# EAGLE board boneclamp (EAGLE 6.4)

Size 160 x 100 mm. Coordinates in mm from the lower left corner, seen from the top.
Outline: 0,0 160,0 160,100 0,100 0,0
Copper layers (1+2*15+16): Top 0.035mm / dielectric 1.5mm / Route2 0.035mm / dielectric 0.15mm / Route15 0.035mm / dielectric 0.2mm / Bottom 0.035mm
Design rules "default *": minimum track width 10mil, minimum drill 24mil, track to track 8mil, track to pad 8mil, pad to pad 8mil, via to via 8mil, smd to smd 8mil, copper to edge 40mil, drill to drill 8mil, minimum pad ring 10mil, minimum via ring 8mil, stop-mask expansion 4mil, vias tented up to drill 0mil, thermal gap 10mil

## Footprints (pad centres in the part's own frame; a part is rotated, then mirrored left to right if it is on the bottom)
HDF15H = drill 0.9 pad 1.778 octagon: 1 4.329,2.54 | drill 0.9 pad 1.778: 2 2.043,2.54; 3 -0.243,2.54; 4 -2.529,2.54; 5 -4.815,2.54; 6 5.472,0; 7 3.186,0; 8 0.9,0; 9 -1.386,0; 10 -3.672,0; 11 4.329,-2.54; 12 2.043,-2.54; 13 -0.243,-2.54; 14 -2.529,-2.54; 15 -4.815,-2.54 | drill 2.8 pad 5.08: P$1 -12.5,0; P$2 12.5,0
C0402 = smd 0.7 x 0.9: 1 -0.65,0; 2 0.65,0
C1206 = smd 1.6 x 1.8: 1 -1.4,0; 2 1.4,0
C0603 = smd 1.1 x 1: 1 -0.85,0; 2 0.85,0
SO-08 = smd 0.6 x 2.2: 1 -1.905,-2.6; 2 -0.635,-2.6; 3 0.635,-2.6; 4 1.905,-2.6; 5 1.905,2.6; 6 0.635,2.6; 7 -0.635,2.6; 8 -1.905,2.6
JP1 = drill 0.914 long: 1 0,-1.27; 2 0,1.27
JP2 = drill 0.914 long: 1 -2.54,0; 2 0,0; 3 2.54,0
R0603 = smd 1 x 1.1: 1 -0.85,0; 2 0.85,0
SMS-002 = smd 1.092 x 2.007: 1 -1.27,-4.496; 2 1.27,-4.496; 3 1.27,4.496; 4 -1.27,4.496
SJ = smd 1.168 x 1.6: 1 -0.762,0; 2 0.762,0
B1,27 = smd 1.27 x 1.27: TP 0,0
QFP50P1200X1200X160-64N = smd 1.473 x 0.279: 1 -5.715,3.759; 2 -5.715,3.251; 3 -5.715,2.743; 4 -5.715,2.261; 5 -5.715,1.753; 6 -5.715,1.245; 7 -5.715,0.762; 8 -5.715,0.254; 9 -5.715,-0.254; 10 -5.715,-0.762; 11 -5.715,-1.245; 12 -5.715,-1.753; 13 -5.715,-2.261; 14 -5.715,-2.743; 15 -5.715,-3.251; 16 -5.715,-3.759; 33 5.715,-3.759; 34 5.715,-3.251; 35 5.715,-2.743; 36 5.715,-2.261; 37 5.715,-1.753; 38 5.715,-1.245; 39 5.715,-0.762; 40 5.715,-0.254; 41 5.715,0.254; 42 5.715,0.762; 43 5.715,1.245; 44 5.715,1.753; 45 5.715,2.261; 46 5.715,2.743; 47 5.715,3.251; 48 5.715,3.759 | smd 0.279 x 1.473: 17 -3.759,-5.715; 18 -3.251,-5.715; 19 -2.743,-5.715; 20 -2.261,-5.715; 21 -1.753,-5.715; 22 -1.245,-5.715; 23 -0.762,-5.715; 24 -0.254,-5.715; 25 0.254,-5.715; 26 0.762,-5.715; 27 1.245,-5.715; 28 1.753,-5.715; 29 2.261,-5.715; 30 2.743,-5.715; 31 3.251,-5.715; 32 3.759,-5.715; 49 3.759,5.715; 50 3.251,5.715; 51 2.743,5.715; 52 2.261,5.715; 53 1.753,5.715; 54 1.245,5.715; 55 0.762,5.715; 56 0.254,5.715; 57 -0.254,5.715; 58 -0.762,5.715; 59 -1.245,5.715; 60 -1.753,5.715; 61 -2.261,5.715; 62 -2.743,5.715; 63 -3.251,5.715; 64 -3.759,5.715
SOP65P640X120-25N = smd 1.473 x 0.356: 1 -2.819,3.581; 2 -2.819,2.921; 3 -2.819,2.286; 4 -2.819,1.626; 5 -2.819,0.965; 6 -2.819,0.33; 7 -2.819,-0.33; 8 -2.819,-0.965; 9 -2.819,-1.626; 10 -2.819,-2.286; 11 -2.819,-2.921; 12 -2.819,-3.581; 13 2.819,-3.581; 14 2.819,-2.921; 15 2.819,-2.286; 16 2.819,-1.626; 17 2.819,-0.965; 18 2.819,-0.33; 19 2.819,0.33; 20 2.819,0.965; 21 2.819,1.626; 22 2.819,2.286; 23 2.819,2.921; 24 2.819,3.581 | smd 3.251 x 5.029: 25 0,0
SOIC127P1030X265-20N = smd 1.981 x 0.559: 1 -4.674,5.715; 2 -4.674,4.445; 3 -4.674,3.175; 4 -4.674,1.905; 5 -4.674,0.635; 6 -4.674,-0.635; 7 -4.674,-1.905; 8 -4.674,-3.175; 9 -4.674,-4.445; 10 -4.674,-5.715; 11 4.674,-5.715; 12 4.674,-4.445; 13 4.674,-3.175; 14 4.674,-1.905; 15 4.674,-0.635; 16 4.674,0.635; 17 4.674,1.905; 18 4.674,3.175; 19 4.674,4.445; 20 4.674,5.715
SOIC127P600X175-8N = smd 1.981 x 0.559: 1 -2.464,1.905; 2 -2.464,0.635; 3 -2.464,-0.635; 4 -2.464,-1.905; 5 2.464,-1.905; 6 2.464,-0.635; 7 2.464,0.635; 8 2.464,1.905
QFN50P400X400X100-21N = smd 1.067 x 0.305: 1 -1.778,0.991; 2 -1.778,0.508; 3 -1.778,0; 4 -1.778,-0.508; 5 -1.778,-0.991; 11 1.778,-0.991; 12 1.778,-0.508; 13 1.778,0; 14 1.778,0.508; 15 1.778,0.991 | smd 0.305 x 1.067: 6 -0.991,-1.778; 7 -0.508,-1.778; 8 0,-1.778; 9 0.508,-1.778; 10 0.991,-1.778; 16 0.991,1.778; 17 0.508,1.778; 18 0,1.778; 19 -0.508,1.778; 20 -0.991,1.778 | smd 2.108 x 2.108: 21 0,0
BEAGLEBONE_SHIELD = drill 1 square: 1 4.445,19.05; 47 52.705,19.05 | drill 1: 2 1.905,19.05; 3 4.445,21.59; 4 1.905,21.59; 5 4.445,24.13; 6 1.905,24.13; 7 4.445,26.67; 8 1.905,26.67; 9 4.445,29.21; 10 1.905,29.21; 11 4.445,31.75; 12 1.905,31.75; 13 4.445,34.29; 14 1.905,34.29; 15 4.445,36.83; 16 1.905,36.83; 17 4.445,39.37; 18 1.905,39.37; 19 4.445,41.91; 20 1.905,41.91; 21 4.445,44.45; 22 1.905,44.45; 23 4.445,46.99; 24 1.905,46.99; 25 4.445,49.53; 26 1.905,49.53; 27 4.445,52.07; 28 1.905,52.07; 29 4.445,54.61; 30 1.905,54.61; 31 4.445,57.15; 32 1.905,57.15; 33 4.445,59.69; 34 1.905,59.69; 35 4.445,62.23; 36 1.905,62.23; 37 4.445,64.77; 38 1.905,64.77; 39 4.445,67.31; 40 1.905,67.31; 41 4.445,69.85; 42 1.905,69.85; 43 4.445,72.39; 44 1.905,72.39; 45 4.445,74.93; 46 1.905,74.93; 48 50.165,19.05; 49 52.705,21.59; 50 50.165,21.59; 51 52.705,24.13; 52 50.165,24.13; 53 52.705,26.67; 54 50.165,26.67; 55 52.705,29.21; 56 50.165,29.21; 57 52.705,31.75; 58 50.165,31.75; 59 52.705,34.29; 60 50.165,34.29; 61 52.705,36.83; 62 50.165,36.83; 63 52.705,39.37; 64 50.165,39.37; 65 52.705,41.91; 66 50.165,41.91; 67 52.705,44.45; 68 50.165,44.45; 69 52.705,46.99; 70 50.165,46.99; 71 52.705,49.53; 72 50.165,49.53; 73 52.705,52.07; 74 50.165,52.07; 75 52.705,54.61; 76 50.165,54.61; 77 52.705,57.15; 78 50.165,57.15; 79 52.705,59.69; 80 50.165,59.69; 81 52.705,62.23; 82 50.165,62.23; 83 52.705,64.77; 84 50.165,64.77; 85 52.705,67.31; 86 50.165,67.31; 87 52.705,69.85; 88 50.165,69.85; 89 52.705,72.39; 90 50.165,72.39; 91 52.705,74.93; 92 50.165,74.93
TO263-3 = smd 1.067 x 2.159: 1 -2.54,-5.791; 2 0,-5.791; 3 2.54,-5.791 | smd 10.8 x 10.41: TAB 0,2.54
SCREW3 = drill 1.1 square: P$1 0,0 | drill 1.1 octagon: P$2 2.54,0; P$3 5.08,0
MO-153-AB = smd 1.473 x 0.356: 1 -2.819,2.286; 2 -2.819,1.626; 3 -2.819,0.965; 4 -2.819,0.33; 5 -2.819,-0.33; 6 -2.819,-0.965; 7 -2.819,-1.626; 8 -2.819,-2.286; 9 2.819,-2.286; 10 2.819,-1.626; 11 2.819,-0.965; 12 2.819,-0.33; 13 2.819,0.33; 14 2.819,0.965; 15 2.819,1.626; 16 2.819,2.286

## Placement (x,y rotation side)
BCIO  F15-SHEILD  [HDF15H]  27.3,74.93 180 top
C1  1 uF  [C0402]  43.18,35.56 0 top
C2  1 uF  [C0402]  43.18,31.75 0 top
C3  1 uF  [C0402]  43.18,27.94 0 top
C4  1 uF  [C0402]  34.29,22.86 0 top
C5  10uF  [C1206]  -55.88,50.8 270 top  (outside the outline)
C6  0.1uF  [C0603]  26.67,59.69 0 top
C7  0.1uF  [C0603]  26.67,54.61 0 top
C8  10uF  [C1206]  -11.43,26.67 0 top  (outside the outline)
C9  0.1uF  [C0603]  26.67,49.53 0 top
C10  10uF  [C1206]  -11.43,20.32 0 top  (outside the outline)
C11  0.1uF  [C0603]  26.67,25.4 0 top
C12  0.1uF  [C0603]  33.02,25.4 0 top
C13  10uF  [C1206]  -11.43,13.97 0 top  (outside the outline)
C14  0.1uF  [C0603]  39.37,25.4 0 top
C15  [C0603]  8.89,74.93 0 top
C16  [C0603]  8.89,67.31 0 top
C17  [C0603]  8.89,59.69 0 top
C18  [C0603]  8.89,52.07 0 top
C19  10uF  [C1206]  33.02,43.18 0 top
C20  10uF  [C1206]  33.02,38.1 0 top
C22  0.1uF  [C0603]  12.7,24.13 0 top
C23  10uF  [C1206]  -11.43,1.27 0 top  (outside the outline)
C24  0.1uF  [C0603]  -53.34,45.72 270 top  (outside the outline)
C26  0.1uF  [C0603]  -53.34,50.8 270 top  (outside the outline)
C27  0.1uF  [C0603]  -40.64,49.53 90 top  (outside the outline)
IC1  24C  [SO-08]  25.4,39.37 0 top
JP1  [JP1]  44.45,57.15 0 top
JP2  [JP2]  36.83,30.48 0 top
JP3  [JP1]  6.35,-16.51 0 top  (outside the outline)
JP4  [JP1]  6.35,-24.13 0 top  (outside the outline)
JP5  [JP2]  -19.05,-1.27 0 top  (outside the outline)
JP6  [JP1]  -26.67,-2.54 0 top  (outside the outline)
R1  [R0603]  8.89,71.12 0 top
R2  [R0603]  8.89,63.5 0 top
R3  [R0603]  8.89,55.88 0 top
R4  [R0603]  8.89,48.26 0 top
R6  5.6k  [R0603]  12.7,20.32 0 top
R7  4.75k  [R0603]  12.7,15.24 0 top
R8  4.75k  [R0603]  12.7,10.16 0 top
R9  4.75k  [R0603]  12.7,5.08 0 top
R10  5.6k  [R0603]  12.7,0 0 top
R11  10k  [R0603]  12.7,-5.08 0 top  (outside the outline)
S1  SWS002  [SMS-002]  15.24,41.91 0 top
SJ1  [SJ]  44.45,49.53 0 top
SJ2  [SJ]  44.45,44.45 0 top
SJ3  [SJ]  44.45,39.37 0 top
SJ4  [SJ]  25.4,58.42 90 top
SJ5  [SJ]  12.7,-11.43 0 top  (outside the outline)
TP1  TPB1,27  [B1,27]  8.89,44.45 0 top
TP2  TPB1,27  [B1,27]  8.89,39.37 0 top
TP3  TPB1,27  [B1,27]  8.89,34.29 0 top
TP4  TPB1,27  [B1,27]  8.89,29.21 0 top
TP5  TPB1,27  [B1,27]  -12.7,-5.08 0 top  (outside the outline)
U1  AD7656YSTZ  [QFP50P1200X1200X160-64N]  93.98,92.71 90 top
U2  AD5754RBREZ  [SOP65P640X120-25N]  16.51,54.61 270 top
U3  SN74ABT541BDW  [SOIC127P1030X265-20N]  76.2,19.05 90 top
U4  ADP3303ARZ-5  [SOIC127P600X175-8N]  39.37,45.72 270 top
U5  ADP3303ARZ-5  [SOIC127P600X175-8N]  26.67,45.72 90 top
U6  ADR431BRZ  [SOIC127P600X175-8N]  -46.99,48.26 0 top  (outside the outline)
U7  AD7682BCPZ  [QFN50P400X400X100-21N]  -82.55,-20.32 0 top  (outside the outline)
U$1  BEAGLEBONE_OUTLINE  [BEAGLEBONE_SHIELD]  0,0 0 top
U$26  LM1085  [TO263-3]  11.43,21.59 0 top
U$28  SCREW3  [SCREW3]  2.54,3.81 0 top
U$42  AD5686RARUZ  [MO-153-AB]  -68.58,-20.32 0 top  (outside the outline)

## Library data of the parts
BCIO U$1 = adafruit
C1-C20 C22-C24 C26 C27 R1-R4 R6-R11 = rcl
IC1 = on-semiconductor-01
JP1-JP6 SJ1-SJ5 = jumper
S1 = smd-special
TP1-TP5 = testpad
U1 = analog-devices-01; MPN: AD7656YSTZ; OC_FARNELL: 1274233; OC_NEWARK: 19M0880; PACKAGE: LQFP-64; SUPPLIER: ANALOG DEVICES
U2 = analog-devices-01; MPN: AD5754RBREZ; OC_FARNELL: 1786050; OC_NEWARK: 51P3755; PACKAGE: TSSOP-24; SUPPLIER: Analog Devices
U3 = ti-extended; MPN: SN74ABT541BDW; OC_FARNELL: 9590170; OC_NEWARK: 85F222; PACKAGE: SOIC-20; SUPPLIER: Texas Instruments
U4 U5 = analog-devices-01; MPN: ADP3303ARZ-5; OC_FARNELL: 1319307; OC_NEWARK: 19M8716; PACKAGE: SOIC-8; SUPPLIER: ANALOG DEVICES
U6 = analog-devices-01; MPN: ADR431BRZ; OC_FARNELL: 1498664; OC_NEWARK: 12M8194; PACKAGE: SOIC-8; SUPPLIER: Analog Devices
U7 = analog-devices-02; MPN: AD7682BCPZ; OC_FARNELL: 2067751; OC_NEWARK: 14N5814; PACKAGE: 20-LFCSP; SUPPLIER: Analog Devices
U$26 U$28 = boneclamp
U$42 = analog-devices-02

## Nets
+12V: C19.1 U$26.3
-12V: U$28.P$3
AGND: BCIO.1 C1.2 C2.2 C3.2 C4.2 C5.2 C6.2 C9.2 C10.2 C16.2 C17.2 C18.2 C23.2 C24.2 C26.2 JP1.2 R2.1 R3.1 R4.1 SJ4.1 U1.32 U1.37 U1.38 U1.43 U1.44 U1.49 U1.52 U1.53 U1.57 U1.59 U4.4 U5.4 U6.4 U$1.1 U$1.2 U$1.47 U$1.48 U$1.89 U$1.90 U$1.91
AIN0: U$1.85
AVCC: C7.1 C9.1 C10.1 U4.1 U4.2
BB_5V: C5.1 C6.1 C8.1 C11.1 U4.5 U4.7 U4.8 U5.5 U5.7 U5.8 U$1.53 U$1.54
CONVST: U1.21 U1.22 U1.23
DAC_A: BCIO.8 C18.1 R4.2 TP1.TP U2.3
DAC_B: BCIO.9 C17.1 R3.2 TP2.TP U2.4
DAC_C: BCIO.10 C16.1 R2.2 TP3.TP U2.23
DAC_D: BCIO.11 C15.1 R1.2 TP4.TP U2.22
DGND: C8.2 C11.2 C13.2 C14.2 C19.2 C20.2 C22.2 IC1.4 JP2.3 S1.3 S1.4 SJ4.2 U1.8 U1.25 U$1.92 U$26.1
DVCC: C12.1 C13.1 C14.1 U1.26 U2.14 U5.1 U5.2
EPAD: U2.25
I2C2_SCL: IC1.6 R10.1 U$1.65
I2C2_SDA: IC1.5 R6.1 U$1.66
N$1: BCIO.2 U1.33
N$2: BCIO.3 U1.36
N$3: BCIO.4 U1.39
N$4: BCIO.5 U1.42
N$5: BCIO.6 U1.45
N$6: BCIO.7 U1.48
N$7: SJ1.1 U2.16
N$8: SJ2.2 SJ3.2 U2.9
N$9: C3.1
N$10: C2.1 U1.56
N$11: C1.1 U1.58
N$12: JP2.2 U1.27
N$13: C4.1 U1.34 U1.35 U1.40 U1.41 U1.46 U1.47 U1.50 U1.60
N$14: IC1.1 R7.1 R8.1 S1.1
N$15: C12.2 U5.3
N$16: C7.2 U4.3
N$17: C15.2 R1.1
N$18: IC1.2 S1.2
N$19: IC1.3 R9.1
N$20: JP3.1 U1.51
N$21: IC1.7 SJ5.1
N$22: R11.1 SJ5.2
N$23: JP6.1
N$24: JP4.1 U2.17
N$25: C26.1 U6.1
PGND: U$28.P$2
SDIN_BB: SJ2.1
SDIN_DC: SJ3.1
SDO_DC: SJ1.2
SGND: BCIO.P$1 BCIO.P$2 JP1.1
VCC: U3.20
VDD: C23.1 C24.1 U1.31 U2.24 U6.2 U7.20 U$42.5
VDD_2: U7.1
VDD_BB: C20.1 U$1.51 U$1.52 U$26.2 U$26.TAB
VDRIVE: C22.1 IC1.8 JP2.1 R6.2 R7.2 R8.2 R9.2 R10.2 R11.2 U$1.49 U$1.50
VIO: U7.15
VREF_2.5V: JP3.2 JP4.2 JP5.2
VREF_OUT: C27.1 JP5.3 JP6.2 TP5.TP U6.6
VSS: U1.30 U2.1

## Tracks (layer width: path | path; a pad name or v marks a point on that pad's centre or on a via)
+12V  (1 unrouted)
AGND  (39 unrouted)
AVCC  (4 unrouted)
BB_5V  (11 unrouted)
CONVST  (2 unrouted)
DAC_A  (4 unrouted)
DAC_B  (4 unrouted)
DAC_C  (4 unrouted)
DAC_D  (4 unrouted)
DGND  (15 unrouted)
DVCC  (6 unrouted)
I2C2_SCL  (2 unrouted)
I2C2_SDA  (2 unrouted)
N$1  (1 unrouted)
N$2  (1 unrouted)
N$3  (1 unrouted)
N$4  (1 unrouted)
N$5  (1 unrouted)
N$6  (1 unrouted)
N$7  (1 unrouted)
N$8  (2 unrouted)
N$10  (1 unrouted)
N$11  (1 unrouted)
N$12  (1 unrouted)
N$13  (8 unrouted)
N$14  (3 unrouted)
N$15  (1 unrouted)
N$16  (1 unrouted)
N$17  (1 unrouted)
N$18  (1 unrouted)
N$19  (1 unrouted)
N$20  (1 unrouted)
N$21  (1 unrouted)
N$22  (1 unrouted)
N$24  (1 unrouted)
N$25  (1 unrouted)
SGND  (2 unrouted)
VDD  (6 unrouted)
VDD_BB  (4 unrouted)
VDRIVE  (10 unrouted)
VREF_2.5V  (2 unrouted)
VREF_OUT  (4 unrouted)
VSS  (1 unrouted)